# Altium PCB USB_keyholder.PcbDoc
Units mm, origin at the board's own origin, x right, y up, seen from the top; angles counter-clockwise.
Board outline 41 x 15.5 mm, 2 copper layers (Top Layer, Bottom Layer), stack 1.571 mm thick; 47 components, 41 nets, 207 pads, 48 vias.
Unrouted connection lines stored in the file: 2.
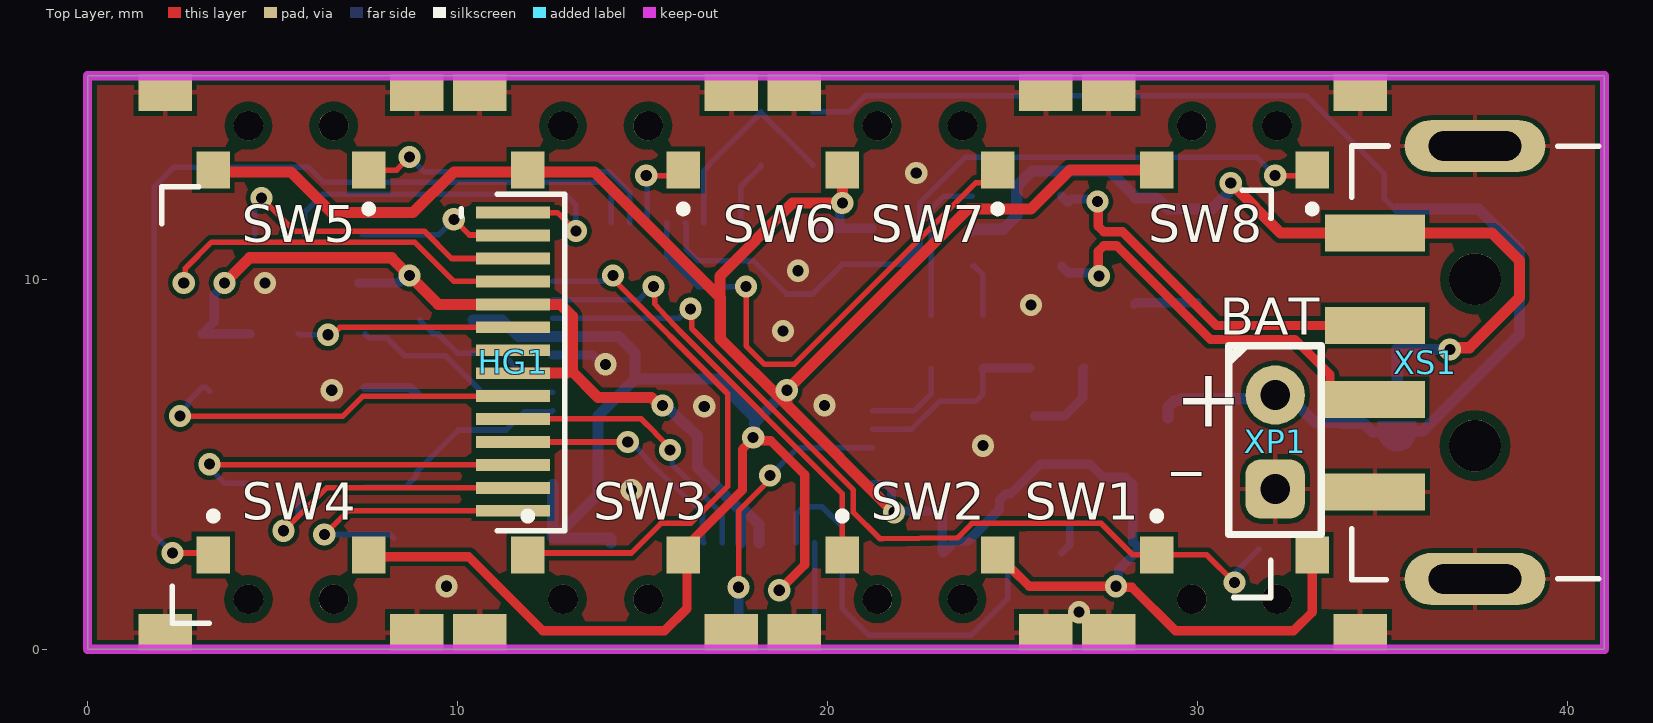
[diagram p0: Top Layer view]
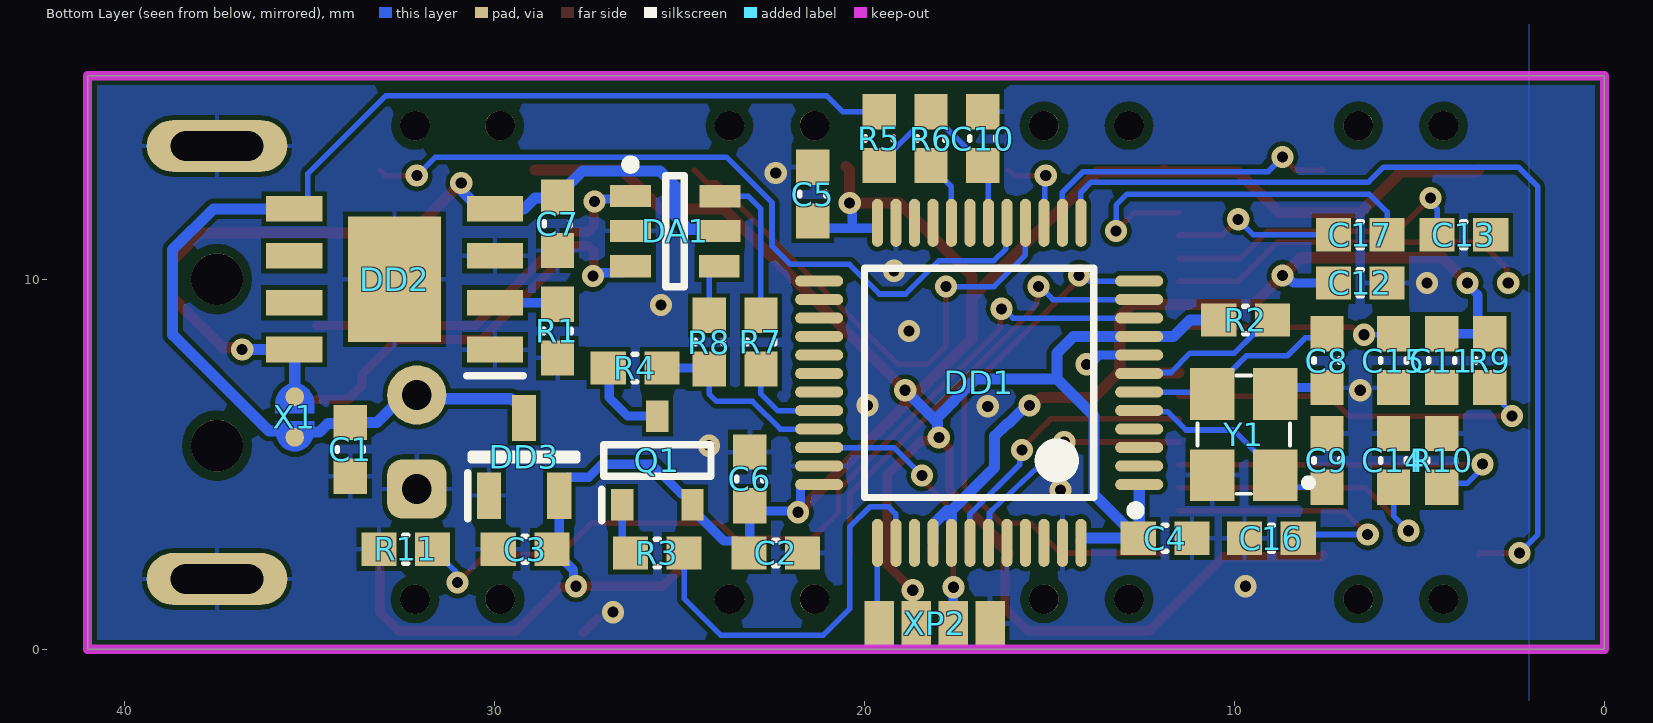
[diagram p1: Bottom Layer view, seen from below]
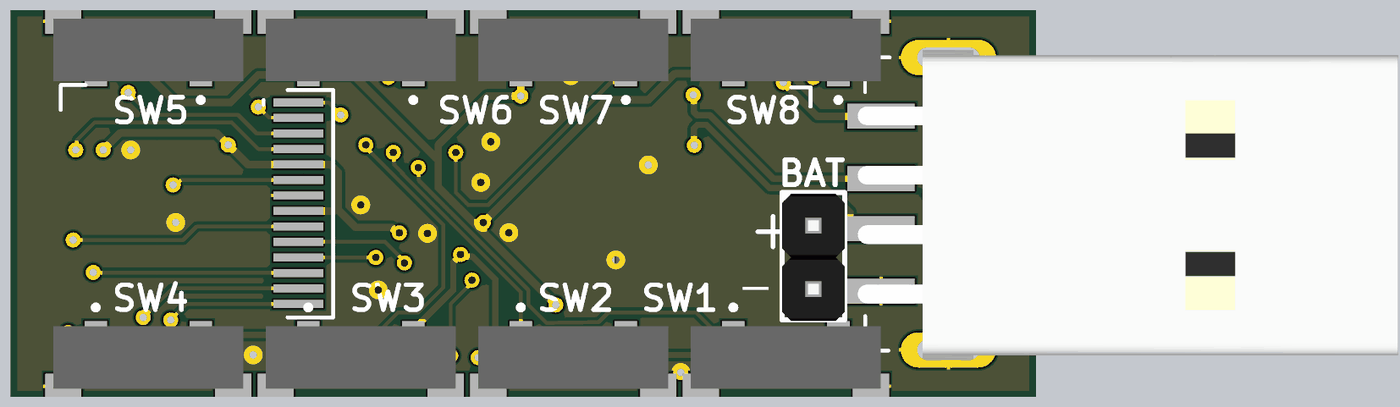
[diagram p2: 3D render of the assembled board from above, using the file's embedded part models]
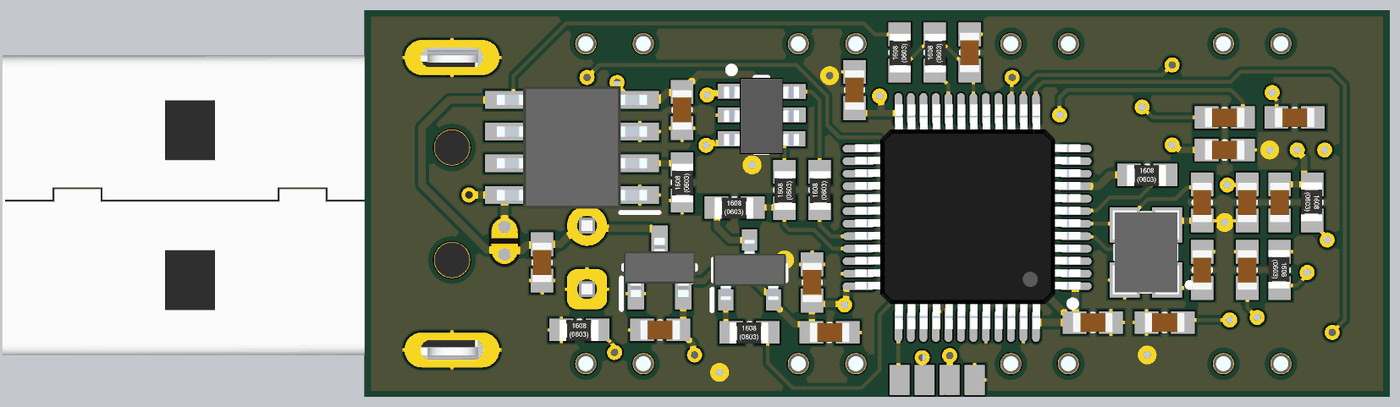
[diagram p3: 3D render of the assembled board from below, using the file's embedded part models]

## Layer stack, top to bottom
Top Solder: solder mask 0.0102, Solder Resist, Dk 3.5
Top Layer: signal copper 0.0356
Dielectric 1: dielectric 1.5, FR-4, Dk 4.8
Bottom Layer: signal copper 0.0356
Bottom Solder: solder mask 0.0102, Solder Resist, Dk 3.5

## Board outline
0,0 41,0 41,15.5 0,15.5

## Design rules (kind name [scope] priority, off if disabled: settings)
BoardOutlineClearance [All] p1: gap=0.2 ignorepadtopadclearanceinfootprint=FALSE
Clearance [All] p1: gap=0.127 ignorepadtopadclearanceinfootprint=FALSE except(0.2: Arc-SMDPad Track-SMDPad; 0.25: Arc-Hole Track-Hole SMDPad-Hole THPad-Hole Fill-Hole Poly-Hole Region-Hole Text-Hole; 0.254: Arc-Via Track-Via SMDPad-Via; 0.33: Arc-THPad Track-THPad; 0.5: THPad-THPad THPad-Via Via-Via Via-Hole)
ComponentClearance [All] p1: gap=0.127 collisioncheckmode=3 verticalgap=0.127 showdistances=TRUE
DiffPairsRouting [All] p1: maxlimit=0.254 minlimit=0.127 mostfreqgap=0.127 toplayer_minwidth=0.127 toplayer_maxwidth=25.4 toplayer_prefwidth=0.127 bottomlayer_minwidth=0.127 bottomlayer_maxwidth=25.4 bottomlayer_prefwidth=0.127 maxuncoupledlength=12.7
Height [All] p1: minheight=0 maxheight=1816.048 prefheight=12.7
HoleSize [All] p1: absolutevalues=TRUE maxlimit=6.3 minlimit=0.3 maxpercent=80.000 minpercent=20.000
HoleToHoleClearance [All] p1: gap=0.25 allowstackedmicrovias=FALSE
MinimumAnnularRing [All] p1: minimumring=0.076
MinimumSolderMaskSliver [All] p1: minsoldermaskwidth=0
PlaneClearance [All] p1: clearance=0.127
PlaneConnect PlaneConnectPowerPads [InPadClass('PowerPads')] p1: planeconnectstyle=Direct reliefexpansion=0.508 reliefentries=4 reliefconductorwidth=0.254 reliefairgap=0.254
PlaneConnect [All] p2: pad.planeconnectstyle=Relief pad.reliefexpansion=0.3 pad.reliefentries=4 pad.reliefconductorwidth=0.127 pad.reliefairgap=0.127 via.planeconnectstyle=Direct via.reliefexpansion=0.3 via.reliefentries=4 via.reliefconductorwidth=0.127 via.reliefairgap=0.127
PolygonConnect PolygonConnectPowerPads [All vs (InPadClass('PowerPads'))] p1: connectstyle=Direct reliefconductorwidth=0.254 reliefentries=4 polygonreliefangle="90 Angle" airgapwidth=0.254
PolygonConnect [All] p2: thpad.connectstyle=Relief thpad.reliefconductorwidth=0.127 thpad.reliefentries=4 thpad.polygonreliefangle="90 Angle" thpad.airgapwidth=0.127 smdpad.connectstyle=Relief smdpad.reliefconductorwidth=0.127 smdpad.reliefentries=4 smdpad.polygonreliefangle="90 Angle" smdpad.airgapwidth=0.127 via.connectstyle=Direct via.reliefconductorwidth=0.127 via.reliefentries=4 via.polygonreliefangle="90 Angle" via.airgapwidth=0.127
RoutingVias [All] p1: holewidth=0.3 width=0.6 viastyle="Through Hole" minholewidth=0.3 minwidth=0.6 maxholewidth=0.6 maxwidth=6.6
SilkToSilkClearance [All] p1: silktosilkclearance=0
SilkToSolderMaskClearance [IsPad] p1: minsilkscreentomaskgap=0.127 clearancetoexposedcopper=TRUE
SolderMaskExpansion [All] p1: expansion=0.075 istentingtop=FALSE
Width [All] p1: maxlimit=25.4 minlimit=0.127 preferedwidth=0.127 minimp=50.000000 maximp=50.000000 favimp=50.000000
20 further rules are at their usual default settings.

## Classes and differential pairs
differential pair USB: +USB_P -USB_N
differential pair USB2: +USB2_P -USB2_N
differential pair USB1: +USB1_P -USB1_N

## Components (designator, comment, footprint, x,y, rotation, side; value= is the part's Value field where it differs from the comment)
C1 "1 мк" C_0603 33.9,5.4 r90 bottom value=2.2µF
C2 "1 мк" C_0603 22.4,2.6 r0 bottom value=2.2µF
C3 "0,1 мк" C_0603 29.175,2.7 r180 bottom value=0.1µF
C4 "0,1 мк" C_0603 11.875,3 r0 bottom value=0.1µF
C5 "0,1 мк" C_0603 21.4,12.3 r270 bottom value=0.1µF
C6 "0,1 мк" C_0603 23.1,4.6 r270 bottom value=0.1µF
C7 "0,1 мк" C_0603 28.3,11.5 r90 bottom value=0.1µF
C8 "10" C_0603 7.5,7.8 r90 bottom value=10pF
C9 "10" C_0603 7.5,5.1 r270 bottom value=10pF
C10 "10 мк" C_0603 16.8,13.8 r270 bottom value=10µF
C11 "0,1 мк" C_0603 4.4,7.8 r270 bottom value=0.1µF
C12 "0,1 мк" C_0603 6.6,9.9 r0 bottom value=0.1µF
C13 "1 мк" C_0603 3.8,11.2 r0 bottom value=2.2µF
C14 "10 мк" C_0603 5.7,5.1 r270 bottom value=10µF
C15 "1 мк" C_0603 5.7,7.8 r270 bottom value=2.2µF
C16 "10 мк" C_0603 9,3 r180 bottom value=10µF
C17 "1 мк" C_0603 6.6,11.2 r180 bottom value=2.2µF
DA1 "USBLC6-2SC6" SOT-23-6 25.1,11.3 r180 bottom
DD1 "STM32f103c8t6" LQFP48 16.9,7.2 r0 bottom
DD2 "TP4056" SOIC127P600X175-9N 32.7,10 r0 bottom
DD3 "MCP1700T-3002E_TT" SOT95P237X112-3N 29.2,5.2 r90 bottom
HG1 "SSD1306_128х64_OLED" 14_pin_OLED 11.5,11.8 r180 top
Q1 "MMBT5401-7-F" SOT95P240X120-3N 25.6,5.1 r90 bottom
R1 "10 к" R_0603 28.3,8.6 r90 bottom
R2 "10 к" R_0603 9.7,8.9 r180 bottom
R3 "1,5 к" R_0603 25.6,2.6 r180 bottom
R4 "1,5 к" R_0603 26.2,7.6 r180 bottom
R5 "1 M" R_0603 19.6,13.8 r90 bottom
R6 "1 M" R_0603 18.2,13.8 r90 bottom
R7 "22" R_0603 22.8,8.3 r90 bottom
R8 "22" R_0603 24.2,8.3 r90 bottom
R9 "10 к" R_0603 3.1,7.8 r270 bottom
R10 "390 к" R_0603 4.4,5.1 r270 bottom
R11 "10 к" R_0603 32.4,2.7 r180 bottom
SW1 "TSA365G00D" 1TS002G26003500CT 31,1.5 r0 top
SW2 "TSA365G00D" 1TS002G26003500CT 22.5,1.5 r0 top
SW3 "TSA365G00D" 1TS002G26003500CT 14,1.5 r0 top
SW4 "TSA365G00D" 1TS002G26003500CT 5.5,1.5 r0 top
SW5 "TSA365G00D" 1TS002G26003500CT 5.5,14 r180 top
SW6 "TSA365G00D" 1TS002G26003500CT 14,14 r180 top
SW7 "TSA365G00D" 1TS002G26003500CT 22.5,14 r180 top
SW8 "TSA365G00D" 1TS002G26003500CT 31,14 r180 top
X1 "Solder_jumper" Solder_jumper 35.4,6.3 r270 bottom
XP1 "BATTERY" PLS-2 32.1,5.6 r0 top
XP2 "PLS2-4" "4 pin debug" 18.1,0.7 r180 bottom
XS1 "DS1098-WN0" DS1098-WN0 37.5,1.9 r90 top
Y1 "X322512MSB4SI" X322512MSB4SI 9.75,5.8 r90 bottom

## Footprints (in the part's own frame and the unit in brackets; to place one, negate y for a bottom-side part, rotate by r counter-clockwise, add the part's x,y. Pads: shape width x height; smd on the part's side, far side on the other; paste and mask are expansions set on the pad)
1TS002G26003500CT [mm]
  rect 0.9x1 smd: 1(-2.1,1.05) 2(2.1,1.05)
  rect 1.45x1 smd: 3(-3.4,-1.05) 4(3.4,-1.05)
  round 0.8 hole 0.8: MH1(-1.15,-0.15) MH2(1.15,-0.15)
  silkscreen extent -2.2,2 -2,2.2, body extent -3.8,-1.15 3.8,1.35, height 3.8
"4 pin debug" [mm]
  rect 0.8x1.2 smd: 1(-1.5,0) 2(-0.5,0) 3(0.5,0) 4(1.5,0)
14_pin_OLED [mm]
  rect 2x0.32 smd: 1(0,0) 2(0,0.62) 3(0,1.24) 4(0,1.86) 5(0,2.48) 6(0,3.1) 7(0,3.72) 8(0,4.34) 9(0,4.96) 10(0,5.58) 11(0,6.2) 12(0,6.82) 13(0,7.44) 14(0,8.06)
  silkscreen extent -1.4,-0.5 1.39,8.6
C_0603 [mm] "Chip Resistor, 2-Leads, Body 1.60x0.80mm, IPC Medium Density"
  rect 0.95x0.9 smd: 1(-0.725,0) 2(0.725,0)
  silkscreen extent -0.05,-0.35 0.05,0.35, body extent -0.8,-0.4 0.8,0.4, height 0.8
DS1098-WN0 [mm]
  rrect100% 1.4x3.8 hole 2.5 slot 0.8 at 0 deg: 0(0,0) 0(11.7,0)
  rect 1x2.7 smd: 1(9.35,2.7) 2(6.85,2.7) 3(4.85,2.7) 4(2.35,2.7)
  rrect100% 1.4x1.4 hole 1.4: -(3.6,0) -(8.1,0)
  silkscreen extent -0.03,-3.34 11.7,3.33, body extent -0.43,-17.98 12,3.63, height 4.7
LQFP48 [mm] "TSQFP, 48-Leads, Body 7,00x7,00mm, Pitch 0,50mm, IPC Medium Density"
  oval 1.3x0.3 smd: 1(-4.325,2.75) 2(-4.325,2.25) 3(-4.325,1.75) 4(-4.325,1.25) 5(-4.325,0.75) 6(-4.325,0.25) 7(-4.325,-0.25) 8(-4.325,-0.75) 9(-4.325,-1.25) 10(-4.325,-1.75) 11(-4.325,-2.25) 12(-4.325,-2.75) 25(4.325,-2.75) 26(4.325,-2.25) 27(4.325,-1.75) 28(4.325,-1.25) 29(4.325,-0.75) 30(4.325,-0.25) 31(4.325,0.25) 32(4.325,0.75) 33(4.325,1.25) 34(4.325,1.75) 35(4.325,2.25) 36(4.325,2.75)
  oval 0.3x1.3 smd: 13(-2.75,-4.325) 14(-2.25,-4.325) 15(-1.75,-4.325) 16(-1.25,-4.325) 17(-0.75,-4.325) 18(-0.25,-4.325) 19(0.25,-4.325) 20(0.75,-4.325) 21(1.25,-4.325) 22(1.75,-4.325) 23(2.25,-4.325) 24(2.75,-4.325) 37(2.75,4.325) 38(2.25,4.325) 39(1.75,4.325) 40(1.25,4.325) 41(0.75,4.325) 42(0.25,4.325) 43(-0.25,4.325) 44(-0.75,4.325) 45(-1.25,4.325) 46(-1.75,4.325) 47(-2.25,4.325) 48(-2.75,4.325)
  silkscreen extent -4.35,-3.1 3.1,3.57, body extent -4.53,-4.52 4.47,4.48, height 1.5
PLS-2 [mm] "PLS-2 вилка штыревая 2.54мм 1x2 прямая"
  round 1.6 hole 0.8: 1(0,1.27)
  rrect50% 1.6x1.6 hole 0.8: 2(0,-1.27)
  silkscreen extent -1.25,-2.5 1.25,2.6, body extent -1.25,-2.54 1.25,2.54, height 8.52
R_0603 [mm] "Chip Resistor, 2-Leads, Body 1.60x0.80mm, IPC Medium Density"
  rect 0.95x0.9 smd: 1(-0.725,0) 2(0.725,0)
  silkscreen extent -0.05,-0.38 0.05,0.38, body extent -0.8,-0.45 0.75,0.4, height 0.45
SOIC127P600X175-9N [mm]
  rect 1.525x0.7 smd: 1(-2.712,1.905) 2(-2.712,0.635) 3(-2.712,-0.635) 4(-2.712,-1.905) 5(2.712,-1.905) 6(2.712,-0.635) 7(2.712,0.635) 8(2.712,1.905)
  rect 2.513x3.402 smd: 9(0,0)
  silkscreen extent -3.47,2.61 -1.95,2.61, body extent -3,-2.45 3,2.45, height 1.75
Solder_jumper [mm]
  rrect100% 0.5x0.5 smd: 1(-0.525,0) 2(0.575,0)
  Top Layer region: 0.144,-0.519 0.369,-0.519 0.587,-0.491 0.777,-0.381 0.911,-0.207 0.969,0.006 0.969,0.006 0.906,0.222 0.765,0.398 0.567,0.506 0.344,0.531 0.344,0.531 0.144,0.531
  Top Layer region: -0.075,0.525 -0.3,0.525 -0.518,0.497 -0.709,0.387 -0.843,0.212 -0.9,0 -0.9,0 -0.837,-0.216 -0.696,-0.392 -0.499,-0.5 -0.275,-0.525 -0.275,-0.525 -0.075,-0.525
SOT95P237X112-3N [mm]
  rect 1.25x0.65 smd: 1(-1.05,0.95) 2(-1.05,-0.95) 3(1.05,0)
  silkscreen extent -1.68,-1.43 0.08,1.53, body extent -1.18,-1.43 1.18,1.43, height 1.12
SOT95P240X120-3N [mm]
  rect 0.85x0.6 smd: 1(-1.2,0.95) 2(-1.2,-0.95) 3(1.2,0)
  silkscreen extent -1.63,-1.45 0.43,1.5, body extent -1.2,-1.45 1.2,1.45, height 1.2
SOT-23-6 [mm] "SOT23, 6-Leads, Body 1,60x1,60mm, Pitch 0,50mm, IPC Medium Density"
  rect 1.1x0.6 smd: 1(-1.225,0.95) 2(-1.225,0) 3(-1.225,-0.95) 4(1.175,-0.95) 5(1.194,0) 6(1.194,0.94)
  silkscreen extent -1.35,-1.5 0.22,1.92, body extent -1.52,-1.56 1.48,1.49, height 1.4
X322512MSB4SI [mm]
  rect 1.4x1.2 smd: 1(-1.1,-0.85) 2(1.1,-0.85) 3(1.1,0.85) 4(-1.1,0.85)
  silkscreen extent -1.6,-1.8 1.6,1.25, body extent -1.68,-1.33 1.68,1.33, height 0.9

## Part data
C1 C2 C13 C15 C17: library part GRM188R61E225MA12D, "CAP CER 2.2UF 25V X5R 0603", Manufacturer="Murata Electronics", Component Type=Capasitor, ComponentLink1Description=Datasheet, ComponentLink1URL=https://search.murata.co.jp/Ceramy/image/img/A01X/G101/ENG/GRM188R61E225MA12-01.pdf, Part Number=GRM188R61E225MA12D
C3 C4 C5 C6 C7 C11 C12: library part GRM188R72A104MA35D, "CAP CER 0.1UF 100V X7R 0603", Manufacturer="Murata Electronics", Component Type=Capasitor, ComponentLink1Description=Datasheet, ComponentLink1URL=https://search.murata.co.jp/Ceramy/image/img/A01X/G101/ENG/GRM188R72A104MA35-01.pdf, Part Number=GRM188R72A104MA35D
C8 C9: library part GRM1885C1H100FA01D, "CAP CER 10PF 50V C0G/NP0 0603", Manufacturer="Murata Electronics", Component Type=Capasitor, ComponentLink1Description=Datasheet, ComponentLink1URL=https://www.murata.com/~/media/webrenewal/support/library/catalog/products/capacitor/mlcc/c02e.ashx?la=en-us, Part Number=GRM1885C1H100FA01D
C10 C14 C16: library part GRM188R61A106KE69J, "CAP CER 10UF 10V X5R 0603", Manufacturer="Murata Electronics", Component Type=Capasitor, ComponentLink1Description=Datasheet, ComponentLink1URL=https://search.murata.co.jp/Ceramy/image/img/A01X/G101/ENG/GRM188R61A106KE69-01.pdf, Part Number=GRM188R61A106KE69J
DD2: "Li Ion charger"
Q1: "Transistor BJT PNP", Manufacturer_Name="Diodes Inc.", Mouser Part Number=621-MMBT5401-F, Arrow Part Number=MMBT5401-7-F, Arrow Price/Stock=https://www.arrow.com/en/products/mmbt5401-7-f/diodes-incorporated?region=nac, Datasheet Link=https://www.diodes.com/assets/Datasheets/ds30057.pdf, Height=1.2mm, Manufacturer_Part_Number=MMBT5401-7-F, Mouser Price/Stock=https://www.mouser.co.uk/ProductDetail/Diodes-Incorporated/MMBT5401-7-F?qs=i73nB8jq7%2FziVmdJmjed1Q%3D%3D
R1 R2 R9 R11: library part CR0603-FX-1002ELF, "RES SMD 10K OHM 1% 1/10W 0603", Manufacturer="Bourns Inc.", Component Type=Resistor, ComponentLink1Description=Datasheet, ComponentLink1URL=https://www.bourns.com/pdfs/chpreztr.pdf, Part Number=CR0603-FX-1002ELF
R3 R4: library part CR0603-FX-1501ELF, "RES SMD 1.5K OHM 1% 1/10W 0603", Manufacturer="Bourns Inc.", Component Type=Resistor, ComponentLink1Description=Datasheet, ComponentLink1URL=https://www.bourns.com/pdfs/chpreztr.pdf, Part Number=CR0603-FX-1501ELF
R5 R6: library part CR0603-FX-1004ELF, "RES SMD 1M OHM 1% 1/10W 0603", Manufacturer="Bourns Inc.", Component Type=Resistor, ComponentLink1Description=Datasheet, ComponentLink1URL=https://www.bourns.com/pdfs/chpreztr.pdf, Part Number=CR0603-FX-1004ELF
R7 R8: library part CR0603-FX-22R0ELF, "RES SMD 22 OHM 1% 1/10W 0603", Manufacturer="Bourns Inc.", Component Type=Resistor, ComponentLink1Description=Datasheet, ComponentLink1URL=https://www.bourns.com/pdfs/chpreztr.pdf, Part Number=CR0603-FX-22R0ELF
R10: library part CR0603-FX-3903ELF, "RES SMD 390K OHM 1% 1/10W 0603", Manufacturer="Bourns Inc.", Component Type=Resistor, ComponentLink1Description=Datasheet, ComponentLink1URL=https://www.bourns.com/pdfs/chpreztr.pdf, Part Number=CR0603-FX-3903ELF
XP1: library part PLS-2
Y1: "12MHz Crystal resonator"
DA1: HelpURL=https://static.chipdip.ru/lib/093/DOC001093117.pdf

## Via types
v1: diameter 0.6, hole 0.3, Top Layer to Bottom Layer, 48 vias

## Nets (pads, with @x,y where several pads share a name; then routed paths per layer and width w, separated by ;. In a path a pad name is that pad's centre, name@x,y a point inside that pad or via, vN(x,y) a via of type N, cw(c..) or ccw(c..) an arc to the next point about the centre after c; other vN are vias at no path point)
3V0: C2.2 C3.2 C4.2 C5.2 C6.2 DD1.1 DD1.9 DD1.24 DD1.36 DD1.48 DD3.2 Q1.2 R2.1 SW1.2 SW2.2 SW3.2 SW4.2 SW5.2 SW6.2 SW7.2 SW8.2 XP2.2 | length 109.5
  Top Layer w0.25: SW4.2 7.65,2.5 10.3,2.5 12.305,0.495 15.595,0.495 16.2,1.1 16.2,2.45 SW3.2 ; SW3.2@16.405,2.905 16.1,2.6 SW3.2 ; v1(17.991,5.721) 17.991,5.691 17.7,5.4 17.7,4.3 16.355,2.955 16.355,2.805 SW3.2 ; v1@18,5.7 18.067,5.633 18.467,5.633 19.383,4.717 19.383,2.281 v1(18.695,1.593) ; SW2.2 24.6,2.5 24.925,2.175 24.975,2.175 25.45,1.7 v1(27.8,1.7) 27.827,1.673 28.227,1.673 29.405,0.495 32.595,0.495 33.1,1 SW1.2
  Top Layer w0.3: SW5.2 3.45,12.9 5.5,12.9 6.6,11.8 8.8,11.8 9.9,12.9 11.85,12.9 SW6.2 11.95,12.9 13.7,12.9 15.2,11.4 16.75,9.85 17.096,9.504 ; SW7.2@20.495,13.045 SW7.2 v1(20.4,12.056) 19.06,12.056 17.096,10.092 17.096,9.504 ; v1(21.8,3.7) 18.9,6.6 ; SW8.2 26.55,12.95 25.5,11.9 23.8,11.9 v1(18.9,7) 18.9,6.6 ; 17.096,9.504 17.1,9.5 17.1,8.4 18.9,6.6
  Bottom Layer w0.25: DD1.24 19.65,11.398 19.673,11.375 20.3,11.375 ; v1(20.4,12.056) 20.333,11.989 20.333,11.408 20.3,11.375 ; C5.2@21.2,11.375 20.3,11.375 ; DD1.36 21.71,4.45 21.733,4.427 21.733,3.767 v1(21.8,3.7) ; v1@21.767,3.733 22.958,3.733 C6.2 23.1,2.625 C2.2 23.45,2.925 23.8,2.925 24.65,3.775 Q1.2 24.65,4.025 24.825,4.2 24.95,4.2 25.75,5 27.1,5 27.45,4.65 28.05,4.65 28.25,4.45 DD3.2 28.25,2.9 C3.2 28.425,2.7 27.867,2.142 27.867,1.767 v1(27.8,1.7)
  Bottom Layer w0.3: R2.1 11.2,8.9 11.65,8.45 DD1.9 14.35,8.45 14.8,8 14.8,7.3 ; DD1.1 12.575,3.025 C4.2 C4.2@12.625,3 ; DD1.48 14.15,2.977 14.127,3 C4.2@12.625,3 ; v1(17.991,5.721) 18.03,5.76 18.03,6.13 v1(18.9,7) ; 18.1,6.2 17,7.3 14.8,7.3 ; C4.2@12.625,3 13.8,4.175 13.8,6.3 14.8,7.3
3V0_OLED: C11.1 C12.2 DD1.40 DD1.41 HG1.5 HG1.8 R9.1 | length 26.5
  Top Layer w0.3: v1(3.7,9.9) 4.379,10.579 8.221,10.579 9.48,9.32 HG1.5 12.78,9.32 13.1,9 13.1,7.606 12.954,7.46 HG1.8 ; 13.047,7.553 13.8,6.8 15.244,6.8 15.461,6.583 v1(15.542,6.583)
  Bottom Layer w0.25: v1(3.7,9.9) 3.7,9.854 3.425,9.579 3.425,8.85 R9.1 C11.1 ; C12.2 8.405,9.9 8.605,10.1 v1(8.7,10.1)
  Bottom Layer w0.3: v1(15.542,6.583) 15.624,6.583 16.105,6.101 16.137,6.101 16.483,5.755 16.483,4.917 17.65,3.75 ; DD1.41 17.65,3.75 ; DD1.40 18.15,3.375 17.775,3.75 17.65,3.75
5V_USB: C7.2 DA1.5 DD2.4 DD2.8 X1.1 XS1.1 | length 23.4
  Top Layer w0.3: v1(30.9,12.6) 32.25,11.25 37.954,11.25 38.705,10.499 38.705,9.501 37.352,8.148 36.869,8.148 v1(36.821,8.1)
  Bottom Layer w0.127: X1.1 X1.1@35.412,6.837 ; DD2.8@35.4,8.083 DD2.8
  Bottom Layer w0.3: DA1.5 23.956,11.349 24.749,11.349 25.116,11.716 25.116,12.516 25.525,12.925 27.625,12.925 28.3,12.25 C7.2 28.325,12.2 28.9,12.2 29.2,11.9 29.983,11.9 DD2.4 ; DD2.4@30.4,11.905 30.852,12.357 30.852,12.552 v1(30.9,12.6) ; X1.1 DD2.8@35.4,8.083 ; DD2.8@35.415,8.097 v1@36.819,8.097
  Bottom Layer w0.35: DD2.8 DD2.8@35.415,8.097 ; v1@36.819,8.097 v1(36.821,8.1)
GND: C1.1 C2.1 C3.1 C4.1 C5.1 C6.1 C7.1 C8.1 C9.1 C10.1 C11.2 C12.1 C14.1 C15.2 C16.1 DA1.2 DD1.8 DD1.23 DD1.35 DD1.44 DD1.47 DD2.1 DD2.3 DD2.9 DD3.1 HG1.7 R1.1 R10.1 R11.1 SW1.3 SW1.4 SW2.3 SW2.4 SW3.3 SW3.4 SW4.3 SW4.4 SW5.3 SW5.4 SW6.3 SW6.4 SW7.3 SW7.4 SW8.3 SW8.4 XP1.2 XP2.4 XS1.0 XS1.4 Y1.2 Y1.4 | length 3.5
  Top Layer w0.25: SW1.3@27.225,0.825 SW1.3
  Bottom Layer w0.25: C8.1 8.725,7.075 Y1.2 ; DD1.8 13.655,7.95 13.905,7.7 v1(14,7.7)
  other v1: 26.8,1 9.7,1.7 14.7,4.3 24.2,5.5 16.67,6.564 19.921,6.591 6.6,7 18.8,8.6 25.5,9.3 4.8,9.9 19.2,10.229 22.4,12.871
MCU_VBAT: C10.2 DD1.18 R5.1 R6.2 | length 5.6
  Bottom Layer w0.15: DD1.18 16.65,12.925 C10.2 16.8,13.1 R6.2@18.2,14.5 ; R6.2 R6.2@18.2,14.5 ; R5.1 19.6,13.1 19.225,13.475 R6.2@18.2,14.5
NetC8_2: C8.2 DD1.6 Y1.3 | length 5.8
  Bottom Layer w0.15: C8.2 7.612,8.413 8.087,8.413 8.569,7.931 9.669,7.931 10.6,7 Y1.3 10.65,6.95 DD1.6
NetC9_2: C9.2 DD1.5 Y1.1 | length 6
  Bottom Layer w0.15: C9.2 8.575,4.375 Y1.1 8.9,4.8 10.025,5.925 11.314,5.925 11.81,6.421 12.546,6.421 DD1.5
NetC13_1: C13.1 HG1.4 | length 10
  Top Layer w0.15: v1(2.6,9.9) 2.646,9.946 2.646,10.296 3.35,11 8.842,11 9.902,9.94 HG1.4
NetC13_2: C13.2 HG1.3 | length 8.5
  Top Layer w0.15: v1(4.7,12.196) 5.596,11.3 9.1,11.3 9.84,10.56 HG1.3
  Bottom Layer w0.15: C13.2 4.525,11.899 4.7,12.074 v1(4.7,12.196)
NetC14_2: C14.2 HG1.13 | length 8
  Top Layer w0.15: v1(5.3,3.2) 6.46,4.36 HG1.13
  Bottom Layer w0.15: v1(5.3,3.2) 5.7,3.6 C14.2
NetC15_1: C15.1 HG1.6 | length 5.9
  Top Layer w0.15: v1(6.496,8.5) 6.618,8.5 6.818,8.7 HG1.6
  Bottom Layer w0.15: C15.1 5.725,8.5 v1(6.496,8.5)
NetC16_2: C16.2 HG1.14 | length 7.3
  Top Layer w0.15: v1(6.4,3.1) 7.04,3.74 HG1.14
  Bottom Layer w0.15: v1(6.4,3.1) 8.175,3.1 C16.2
NetC17_1: C17.1 HG1.2 | length 4.4
  Top Layer w0.15: v1(9.9,11.619) 10.324,11.195 11.485,11.195 HG1.2
  Bottom Layer w0.15: C17.1@7.425,11.2 9.487,11.2 9.9,11.613 v1(9.9,11.619)
NetC17_2: C17.2 HG1.1 | length 10.9
  Top Layer w0.15: HG1.1 12.7,11.8 v1(13.2,11.3)
  Bottom Layer w0.15: C17.2 5.875,11.816 6.359,12.3 12.9,12.3 13.2,12 v1(13.2,11.3)
NetDD1_7: DD1.7 R2.2 | length 4.2
  Bottom Layer w0.15: R2.2 9.35,8.525 9.475,8.525 10,8 11.2,8 11.721,7.479 12.546,7.479 DD1.7
NetDD2_2: DD2.2 R1.2 | length 1.7
  Bottom Layer w0.25: R1.2 28.34,9.365 DD2.2
NetHG1_9: HG1.9 R9.2 | length 10.4
  Top Layer w0.15: v1(2.5,6.3) 6.9,6.3 7.44,6.84 HG1.9
  Bottom Layer w0.15: v1(2.5,6.3) 2.5,6.388 2.725,6.613 2.725,6.7 R9.2 ; R9.2@3.2,7.075 R9.2@3.3,6.975
NetHG1_12: HG1.12 R10.2 | length 9.6
  Top Layer w0.15: v1(3.3,5) 3.31,4.99 11.49,4.99 HG1.12
  Bottom Layer w0.15: v1(3.3,5) 3.366,4.934 3.366,4.834 3.718,4.482 4.293,4.482 R10.2
NetQ1_1: Q1.1 R3.1 | length 1.4
  Bottom Layer w0.2: R3.1 26.55,2.825 Q1.1
NetQ1_3: Q1.3 R4.1 | length 2.3
  Bottom Layer w0.25: Q1.3 26.4,6.3 26.9,6.8 26.9,7.575 R4.1
SCL_OLED: DD1.42 HG1.10 | length 7.7
  Top Layer w0.15: HG1.10 11.509,6.229 14.964,6.229 15.341,5.852 15.341,5.848 15.747,5.442 v1(15.747,5.383)
  Bottom Layer w0.15: v1(15.747,5.383) 15.803,5.326 15.803,4.997 17.15,3.65 DD1.42
SDA_OLED: DD1.43 HG1.11 | length 6.7
  Top Layer w0.15: HG1.11 v1(14.6,5.6)
  Bottom Layer w0.15: v1(14.6,5.6) 14.7,5.6 14.788,5.512 15.278,4.964 ccw(c15.747,5.383) 15.315,4.926 16.533,3.773 16.621,3.685 16.621,2.904 DD1.43
SW1: DD1.10 R11.2 SW1.1 | length 23.8
  Top Layer w0.15: v1(16.3,9.2) 16.325,9.175 16.325,8.675 20.7,4.3 20.7,3.7 21.375,3.025 21.419,2.981 21.482,2.981 23.51,3.01 23.9,3.4 27.4,3.4 28.25,2.55 SW1.1 30.25,2.55 v1(31,1.8)
  Bottom Layer w0.15: DD1.10 15.987,8.95 16.237,9.2 v1(16.3,9.2) ; v1(31,1.8) 31.067,1.867 31.067,2.117 31.65,2.7 R11.2
SW2: DD1.11 SW2.1 | length 12.2
  Top Layer w0.15: v1(15.3,9.8) 15.325,9.775 15.325,9.337 15.835,8.777 ccw(c16.3,9.2) 15.853,8.758 16.048,8.56 20.4,4.2 SW2.1
  Bottom Layer w0.15: DD1.11 14.908,9.45 15.258,9.8 v1(15.3,9.8)
SW3: DD1.12 SW3.1 | length 14.8
  Top Layer w0.15: SW3.1 11.95,2.6 14.7,2.6 15.5,3.4 16.3,3.4 17.299,4.399 17.299,6.91 17.263,6.945 14.2,10.008 v1(14.2,10.1)
  Bottom Layer w0.15: DD1.12 13.928,9.95 14.078,10.1 v1(14.2,10.1)
SW4: DD1.13 SW4.1 | length 24.9
  Top Layer w0.15: v1(2.3,2.6) 3.35,2.6 SW4.1
  Bottom Layer w0.15: v1(2.3,2.6) 1.8,3.1 1.8,12.5 2.329,13.029 5.971,13.029 6.377,12.623 13.877,12.623 14.15,12.35 DD1.13
SW5: DD1.14 SW5.1 | length 8.4
  Top Layer w0.15: SW5.1 8.35,12.95 v1(8.7,13.3)
  Bottom Layer w0.15: v1(8.7,13.3) 9.1,12.9 14.1,12.9 14.65,12.35 DD1.14
SW6: DD1.15 SW6.1 | length 2.4
  Top Layer w0.15: v1(15.1,12.8) 15.95,12.8 SW6.1
  Bottom Layer w0.15: v1(15.1,12.8) 15.125,12.775 15.125,11.55 DD1.15
SW7: DD1.16 SW7.1 | length 14.2
  Top Layer w0.15: v1(17.8,9.8) 17.8,8.2 18.3,7.7 19.1,7.7 24.013,12.613 24.263,12.613 SW7.1
  Bottom Layer w0.15: DD1.16 15.65,10.65 16.5,9.8 v1(17.8,9.8)
SW8: DD1.17 SW8.1 | length 20.6
  Top Layer w0.15: v1(32.1,12.8) 32.95,12.8 SW8.1
  Bottom Layer w0.15: DD1.17 16.179,11.496 16.179,10.821 16.5,10.5 17.99,10.5 18.89,9.6 19.6,9.6 20.4,10.4 22,10.4 22.5,10.9 22.5,12.073 23.729,13.302 31.598,13.302 v1(32.1,12.8)
SWD_CLK: DD1.37 XP2.1 | length 2.2
  Bottom Layer w0.15: XP2.1 19.65,0.75 DD1.37
SWD_IO: DD1.34 XP2.3 | length 7.4
  Top Layer w0.15: v1(17.598,1.673) 17.598,3.736 18.447,4.584 v1(18.447,4.693)
  Bottom Layer w0.15: v1(18.447,4.693) 19.204,5.45 DD1.34
  Bottom Layer w0.25: v1(17.598,1.673) 17.598,0.702 XP2.3
USB1_EN: DD1.38 R3.2 | length 11
  Bottom Layer w0.15: DD1.38 19.16,2.885 19.16,3.66 19.35,3.85 19.847,3.85 20.4,3.297 20.4,1.091 21.113,0.378 23.887,0.378 24.875,1.366 R3.2
USB1_N: DD1.32 R7.1 | length 2.4
  Bottom Layer w0.15: DD1.32 22.35,6.45 22.8,6.9 R7.1
USB1_P: DD1.33 R4.2 R8.1 | length 5.3
  Bottom Layer w0.15: DD1.33 22.272,5.95 23.022,6.7 24,6.7 24.2,6.9 R8.1
  Bottom Layer w0.25: R8.1 24.225,7.6 R4.2
USB2_N: DA1.6 R7.2 | length 4.1
  Bottom Layer w0.15: R7.2 22.8,11.9 23.14,12.24 DA1.6
USB2_P: DA1.4 R8.2 | length 1.5
  Bottom Layer w0.15: DA1.4 23.975,10.35 24.2,10.125 R8.2
USB_N: DA1.1 XS1.2 | length 10.4
  Top Layer w0.25: v1(27.296,12.1) 27.317,12.079 27.317,11.428 27.464,11.282 27.974,11.282 30.505,8.75 XS1.2
  Bottom Layer w0.25: DA1.1 26.5,12.075 26.592,12.167 27.229,12.167 v1(27.296,12.1)
USB_P: DA1.3 XS1.3 | length 11.2
  Top Layer w0.25: v1(27.339,10.086) 27.317,10.108 27.317,10.758 27.464,10.905 27.817,10.905 30.349,8.373 32.627,8.373 33.585,7.415 33.585,7.125 33.96,6.75 XS1.3
  Bottom Layer w0.25: DA1.3 26.5,10.175 27.155,10.175 27.244,10.086 v1(27.339,10.086)
VBAT: C1.2 DD2.5 DD3.3 R5.2 X1.2 XP1.1 | length 35
  Bottom Layer w0.15: R5.2 20.587,14.525 21.017,14.955 32.945,14.955 35.046,12.854 35.046,12.18 35.321,11.905 DD2.5
  Bottom Layer w0.3: DD3.3 29.2,6.55 29.375,6.725 29.506,6.725 29.551,6.77 XP1.1@32.1,6.77 ; XP1.1 32.43,6.87 33.175,6.125 C1.2 33.925,6.1 34.5,6.1 34.726,5.874 34.974,5.874 35,5.9 ; X1.2@35.222,5.9 35.397,5.725 X1.2 ; X1.2@35.378,5.7 35.578,5.9 36.1,5.9 38.7,8.5 38.7,10.8 37.6,11.9 35.417,11.9 DD2.5
VBAT_EN: DD1.20 R6.1 | length 1.8
  Bottom Layer w0.15: DD1.20 17.65,12.5 18.2,13.05 R6.1
pads on no net: DD1.2 DD1.3 DD1.4 DD1.19 DD1.21 DD1.22 DD1.25 DD1.26 DD1.27 DD1.28 DD1.29 DD1.30 DD1.31 DD1.39 DD1.45 DD1.46 DD2.6 DD2.7 SW1.MH1 SW1.MH2 SW2.MH1 SW2.MH2 SW3.MH1 SW3.MH2 SW4.MH1 SW4.MH2 SW5.MH1 SW5.MH2 SW6.MH1 SW6.MH2 SW7.MH1 SW7.MH2 SW8.MH1 SW8.MH2 XS1.-

## Polygon pours and split planes (outlines as drawn)
GND on Bottom Layer "NONET_L-01_P-002" (solid, pour order 5): -9.306,21.577 56.226,21.577 56.226,-1.664 -9.306,-1.664
GND on Bottom Layer "NONET_L-01_P-001" (solid, shelved, pour order 4): 2.034,21.7 67.566,21.7 67.566,-1.541 2.034,-1.541
GND on Top Layer "NONET_L-01_P-001" (solid, pour order 2): -8.176,17.827 57.356,17.827 57.356,-5.414 -8.176,-5.414

## Keep-outs
Keep-Out Layer:
  lines w0.254: 41,0 0,0 0,15.5 41,15.5 41,0 ; 41,0 41,0

## Silkscreen, mask and mechanical layers (free items; w line width, h text height)
Top Overlay:
  lines w0.15: 2,11.5 2,12.5 3,12.5 ; 2.286,1.697 2.286,0.697 3.286,0.697 ; 30.986,1.397 31.986,1.397 31.986,2.397 ; 31.215,12.405 31.988,12.405 31.988,11.643 31.977,11.643
  text "BAT" at 30.6,8.5 h1
  text "+" at 29.38,6.013 h1.6
  text "_" at 29.3,4.655 h2